# EAGLE board freq-gen (EAGLE 8.0.2)
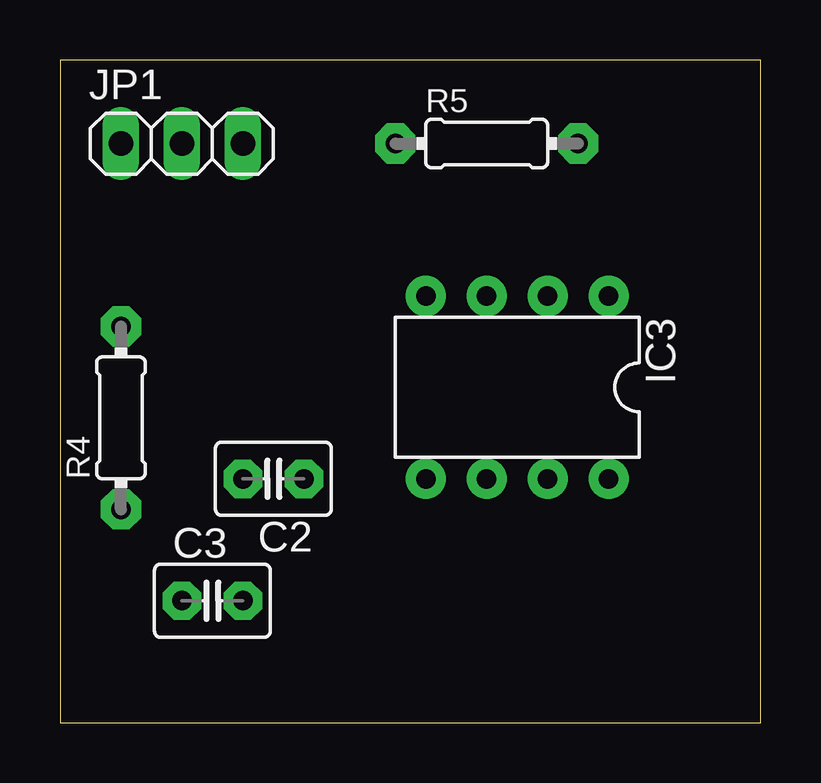
[diagram p0: board, top side]
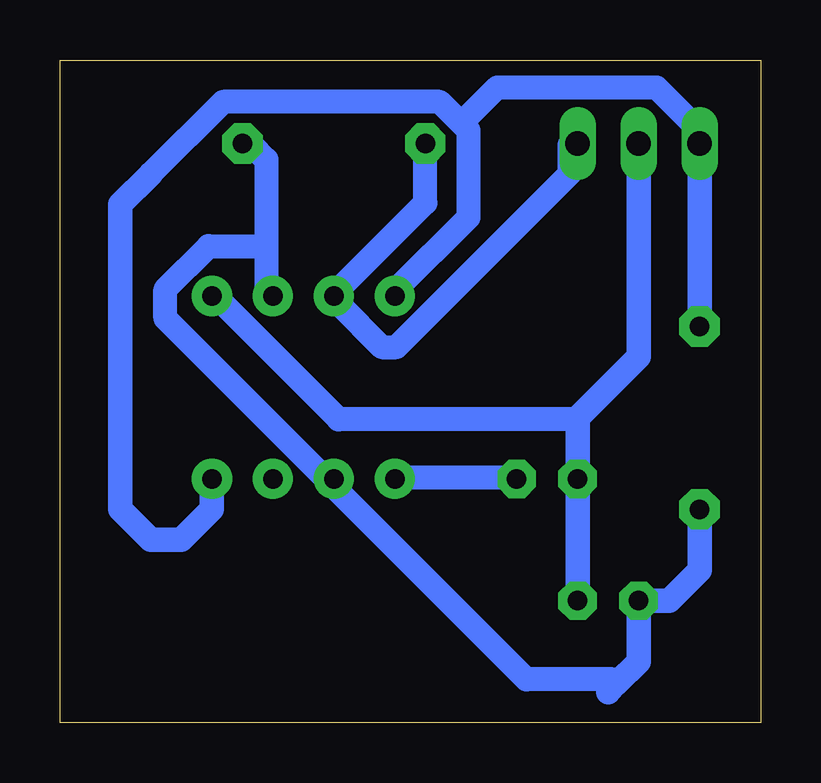
[diagram p1: board, bottom side, seen from below]

Size 29.19 x 27.61 mm. Coordinates in mm from the lower left corner, seen from the top.
Outline: 0,0 29.19,0 29.19,27.61 0,27.61 0,0
Copper layers (1*16): Top 0.035mm / dielectric 1.5mm / Bottom 0.035mm
Design rules "default *": minimum track width 1mm, minimum drill 24mil, track to track 8mil, track to pad 8mil, pad to pad 8mil, via to via 8mil, smd to smd 8mil, copper to edge 40mil, drill to drill 8mil, minimum pad ring 10mil, minimum via ring 8mil, stop-mask expansion 4mil, vias tented up to drill 0mil, thermal gap 10mil

## Footprints (pad centres in the part's own frame; a part is rotated, then mirrored left to right if it is on the bottom)
C2.5-3 = drill 0.813 pad 1.6 octagon: 1 -1.27,0; 2 1.27,0
DIL08-ROUND = drill 0.813 pad 1.676: 1 -3.81,-3.81; 2 -1.27,-3.81; 3 1.27,-3.81; 4 3.81,-3.81; 5 3.81,3.81; 6 1.27,3.81; 7 -1.27,3.81; 8 -3.81,3.81
1X03 = drill 1.016 long: 1 -2.54,0; 2 0,0; 3 2.54,0
0204/7 = drill 0.813 pad 1.676 octagon: 1 -3.81,0; 2 3.81,0

## Placement (x,y rotation side)
C2  1uF  [C2.5-3]  8.89,10.16 180 top
C3  1uF  [C2.5-3]  6.35,5.08 0 top
IC3  LM555N  [DIL08-ROUND]  19.05,13.97 180 top
JP1  [1X03]  5.08,24.13 0 top
R4  [0204/7]  2.54,12.7 90 top
R5  [0204/7]  17.78,24.13 0 top

## Library data of the parts
C2 C3 = capacitor-wima
IC3 R4 R5 = adafruit
JP1 = pinhead

## Nets
CLK: IC3.3 JP1.3 R5.1
GND: C2.2 C3.2 IC3.1 JP1.2
N$16: C2.1 IC3.5
N$18: C3.1 IC3.2 IC3.6 R4.1 R5.2
VCC: IC3.4 IC3.8 JP1.1 R4.2

## Tracks (layer width: path | path; a pad name or v marks a point on that pad's centre or on a via)
CLK
  Bottom 1: JP1.3 7.96,24.06 7.96,22.86 15.17,15.64 15.78,15.64 17.58,17.45 IC3.3 17.58,18.05 13.97,21.66 13.97,24.06 R5.1
GND
  Bottom 1: 7.62,12.63 17.58,12.63 22.39,17.45 IC3.1
  Bottom 1.016: C3.2 C2.2 7.62,12.63 7.62,12.7 5.08,15.24 JP1.2
N$16
  Bottom 1: C2.1 10.36,10.23 15.17,10.23 IC3.5
N$18
  Bottom 1: 20.59,19.85 20.59,23.46 21.19,24.06 R5.2 | 20.59,19.85 20.59,18.05 IC3.2 | 5.98,1.64 6.15,1.8 9.76,1.8 17.58,9.63 IC3.6 18.18,10.23 24.8,16.84 24.8,18.05 23,19.85 20.59,19.85
  Bottom 1.016: R4.1 2.54,6.35 3.81,5.08 C3.1 5.08,2.54 5.98,1.64 6.35,1.27
VCC
  Bottom 1: 26,22.26 25.4,22.86 22.39,25.87 13.37,25.87 12.47,24.97 | 12.47,24.97 12.17,24.67 12.17,21.06 15.17,18.05 IC3.4 | IC3.8 23,10.23 | 12.47,24.97 10.96,26.47 4.34,26.47 2.54,24.67 JP1.1
  Bottom 1.016: R4.2 JP1.1 | 25.4,22.86 26.67,21.59 26.67,8.89 25.4,7.62 24.13,7.62 22.86,8.89 IC3.8